# Altium PCB LaserDiode_Driver.PcbDoc (part 1 of 3)
Units mm, origin at the board's own origin, x right, y up, seen from the top; angles counter-clockwise.
Board outline 91.45 x 80 mm, 4 copper layers (Top Layer, Layer 1, Layer 2, Bottom Layer), stack 1.586 mm thick; 92 components, 37 nets, 225 pads, 313 vias.
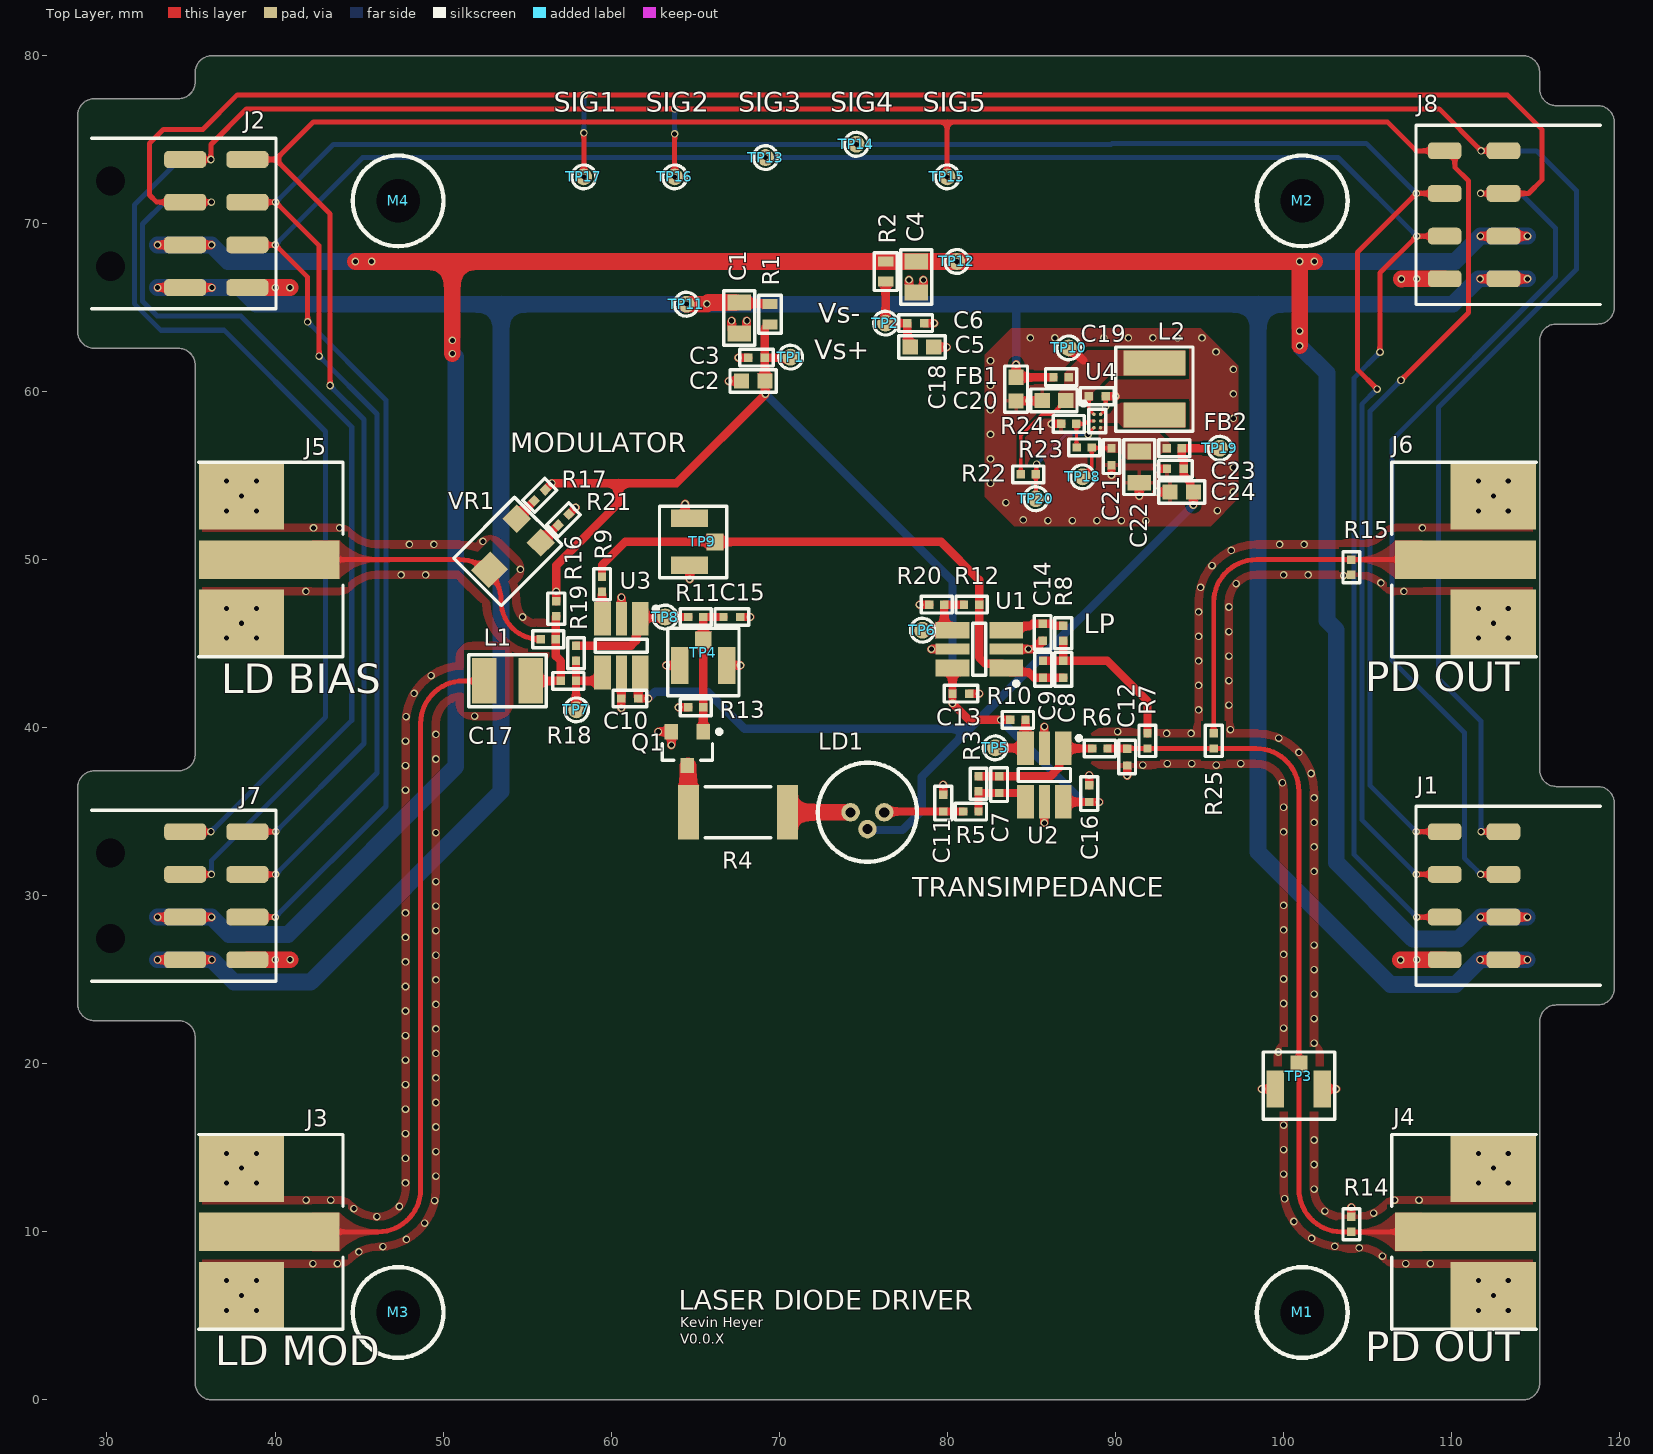
[diagram p0: Top Layer view]
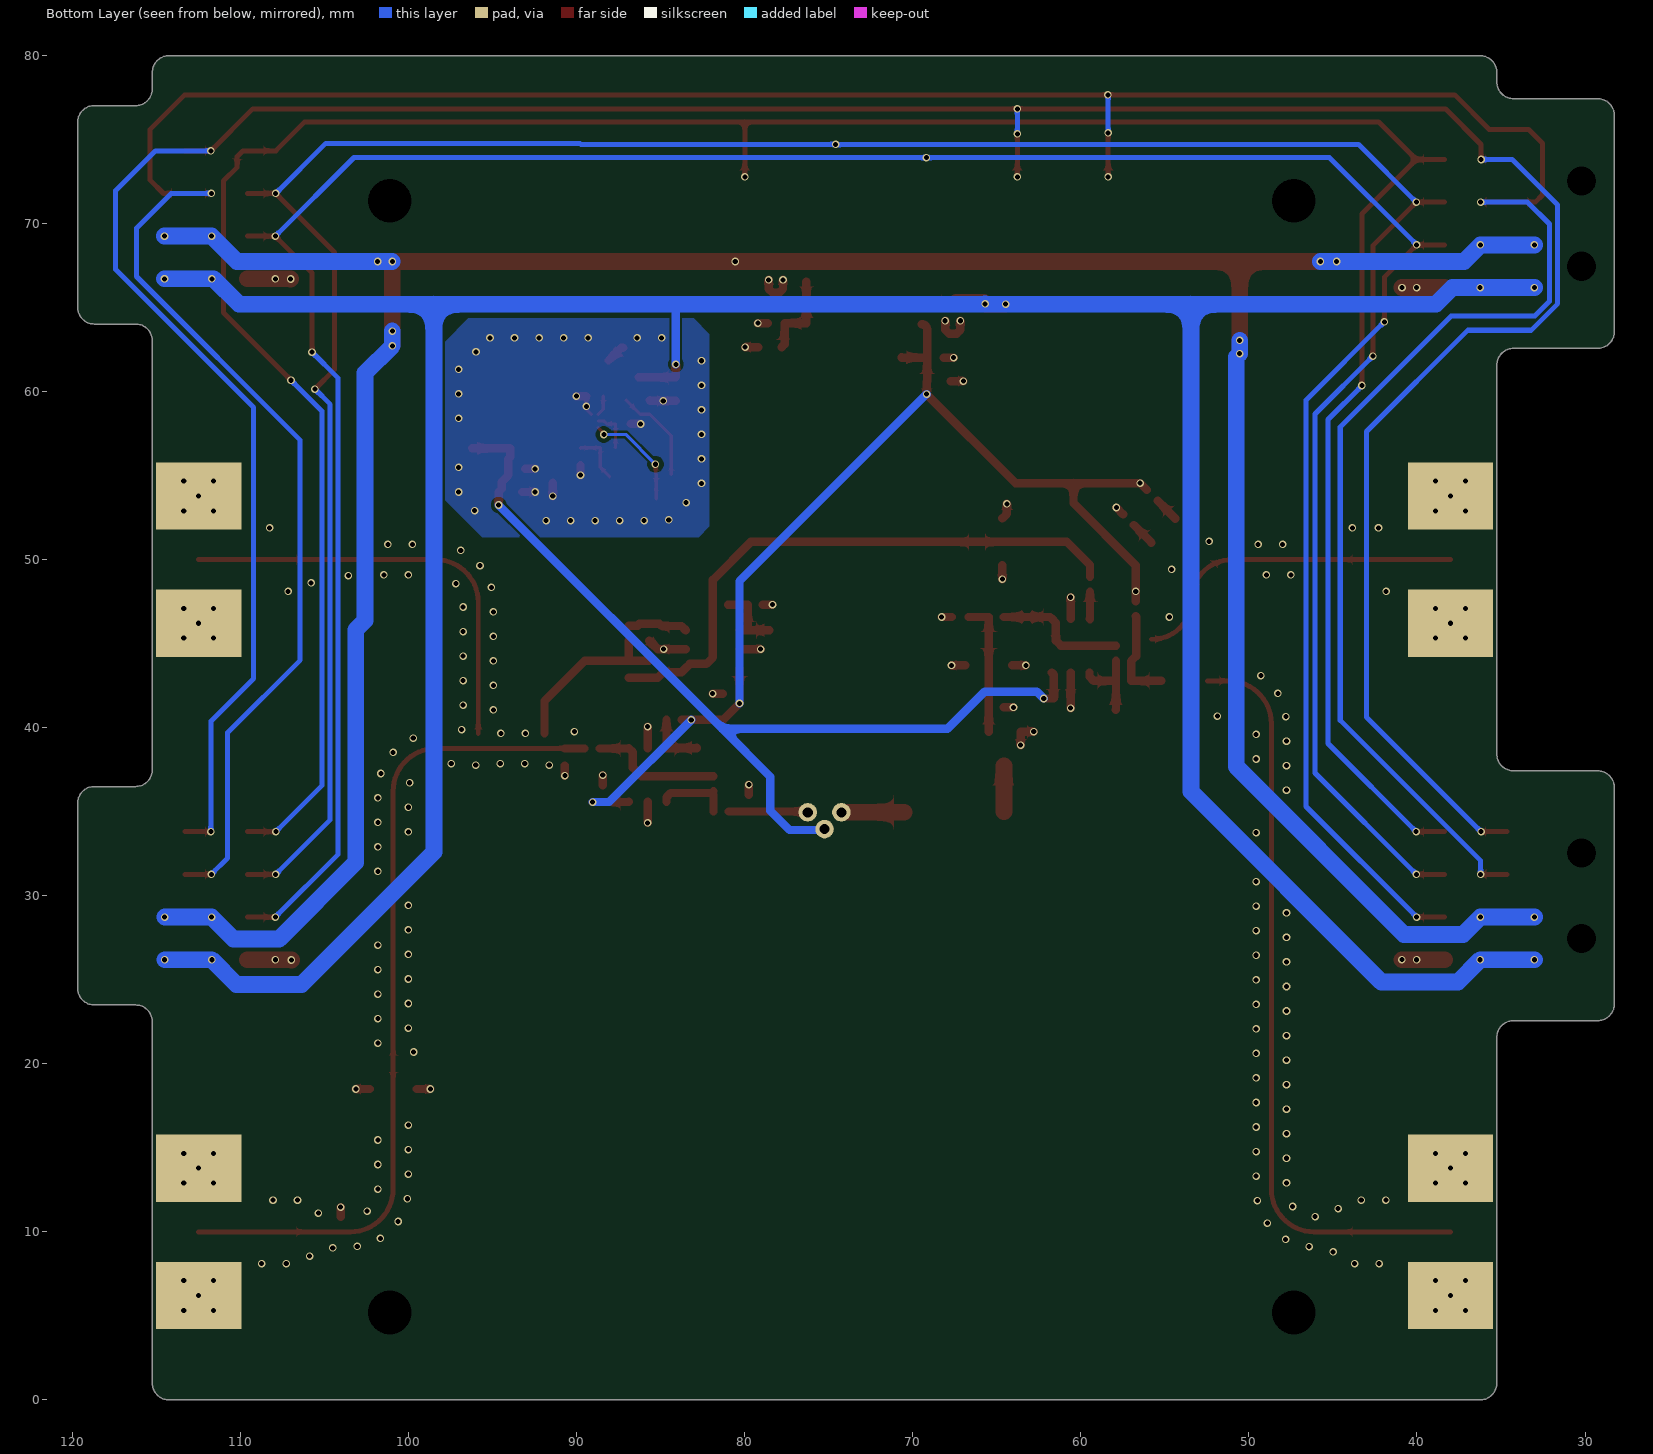
[diagram p1: Bottom Layer view, seen from below]
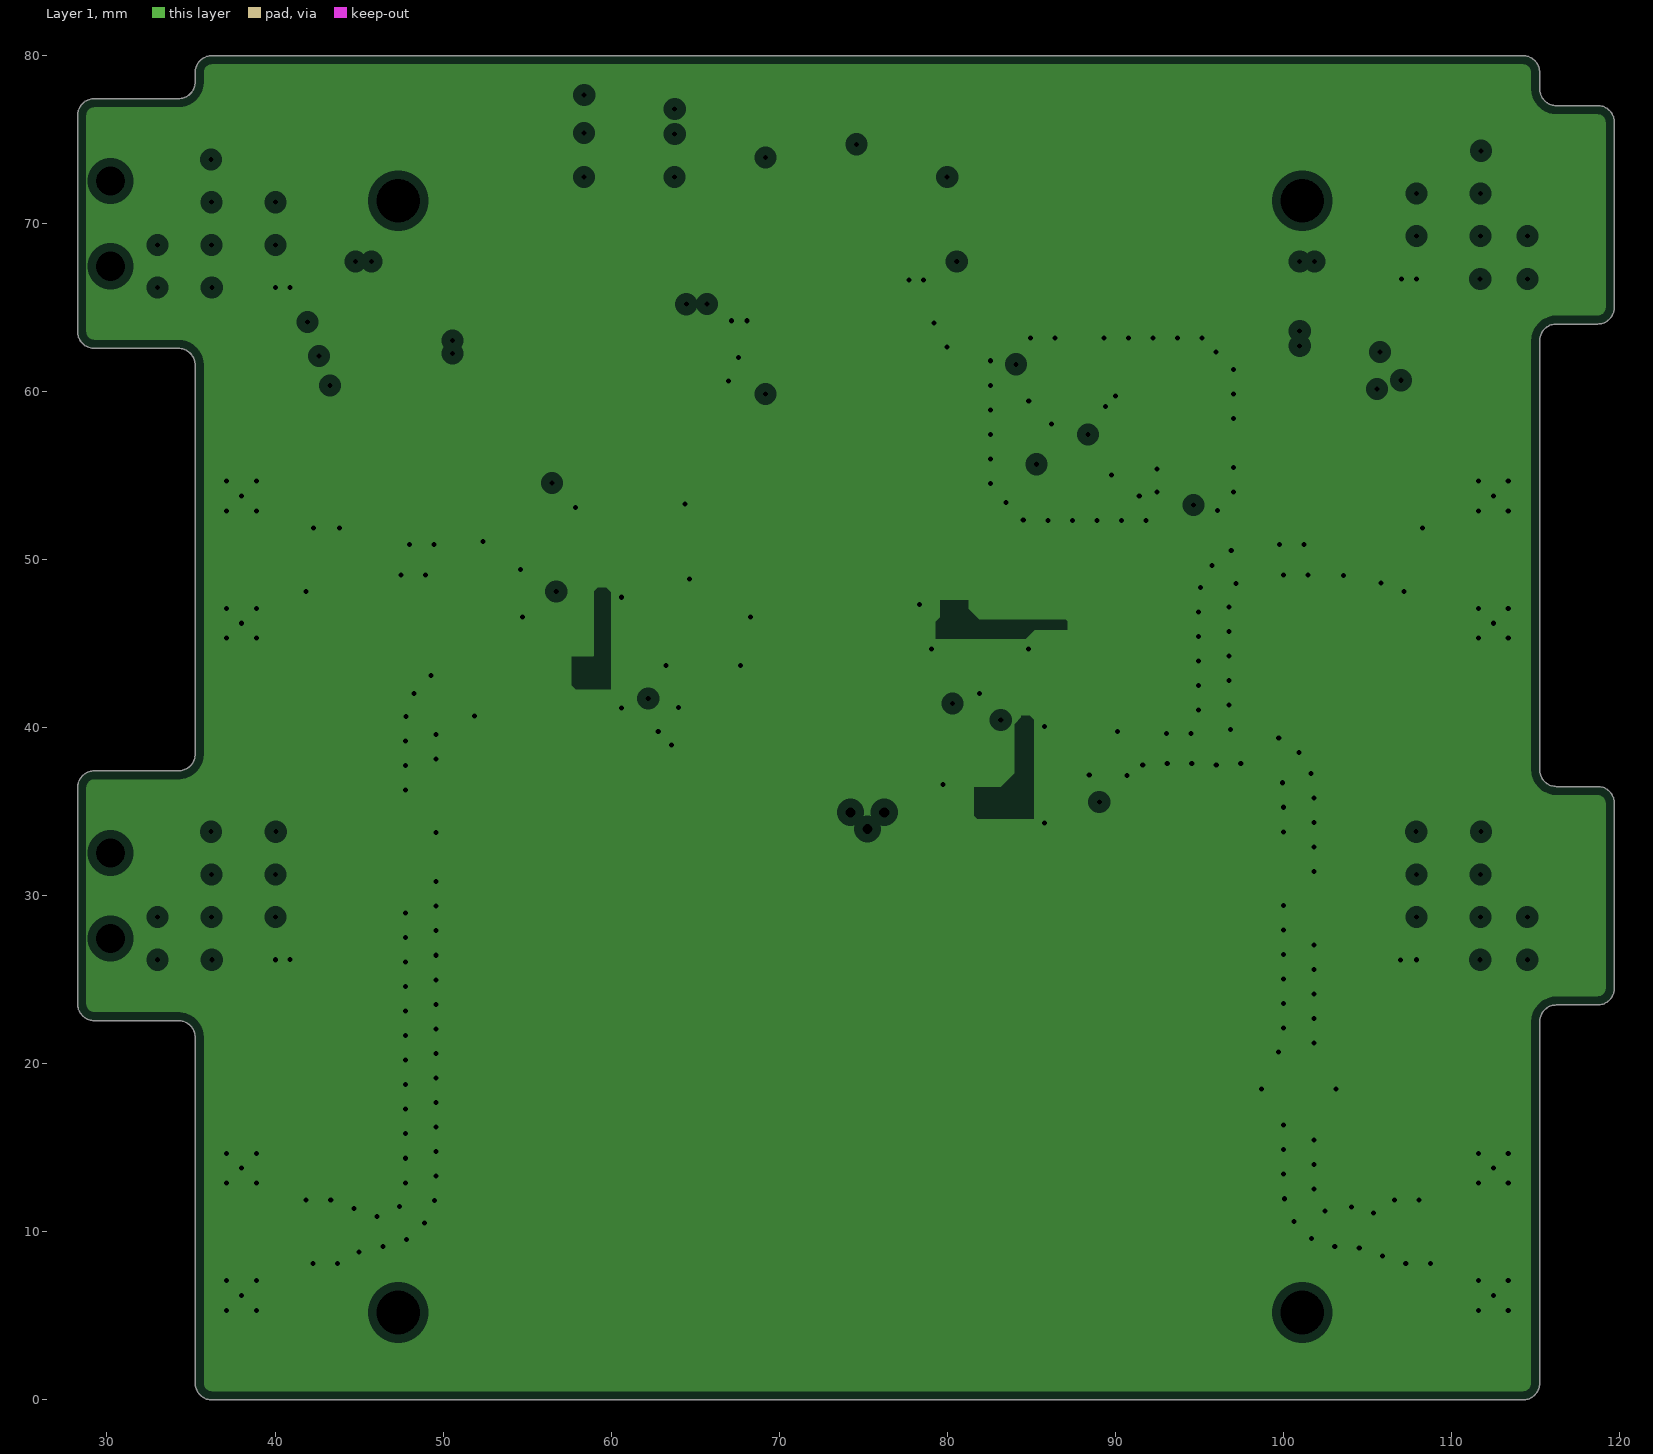
[diagram p2: Layer 1, clearances drawn from the general rule]
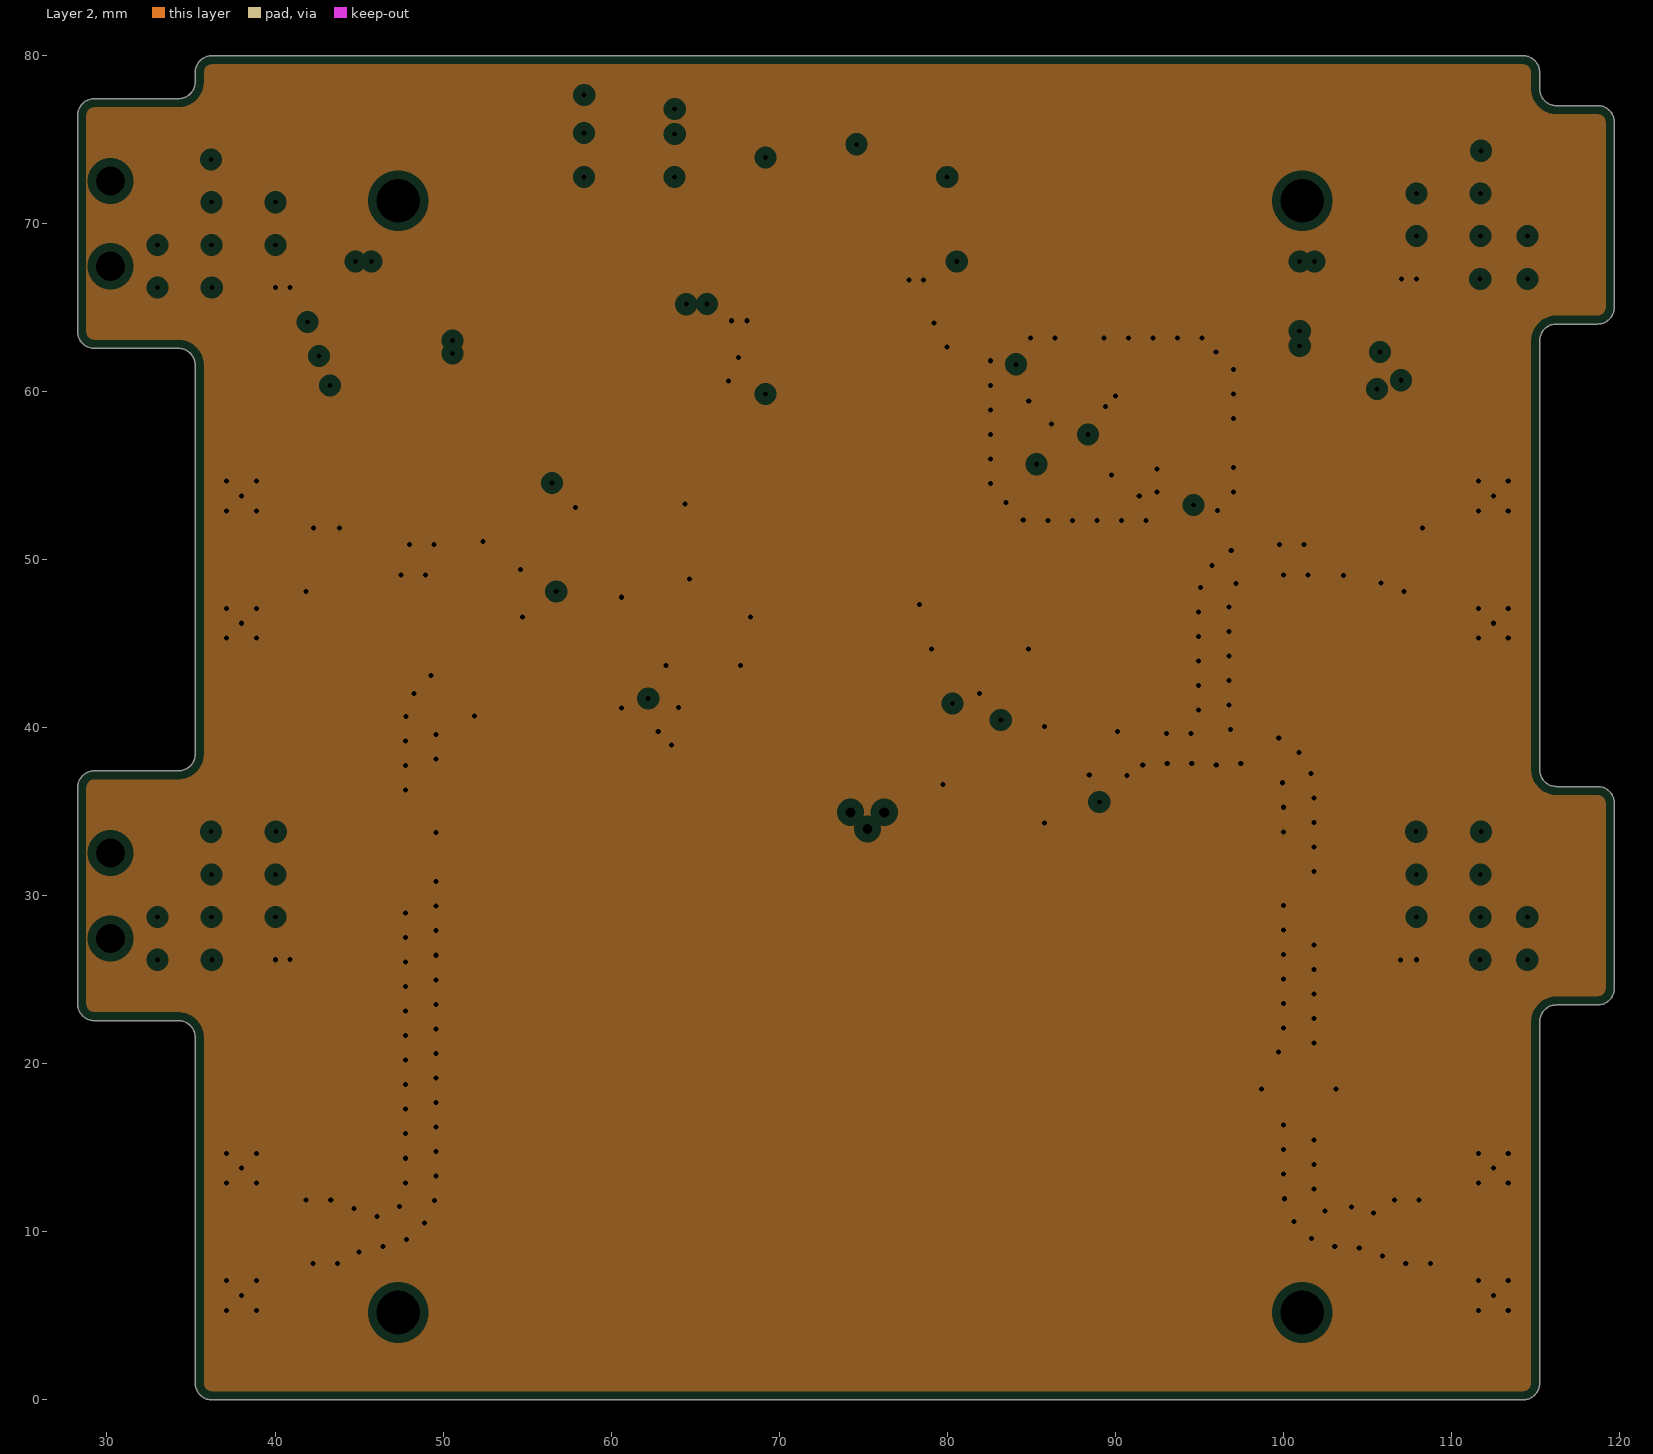
[diagram p3: Layer 2, clearances drawn from the general rule]
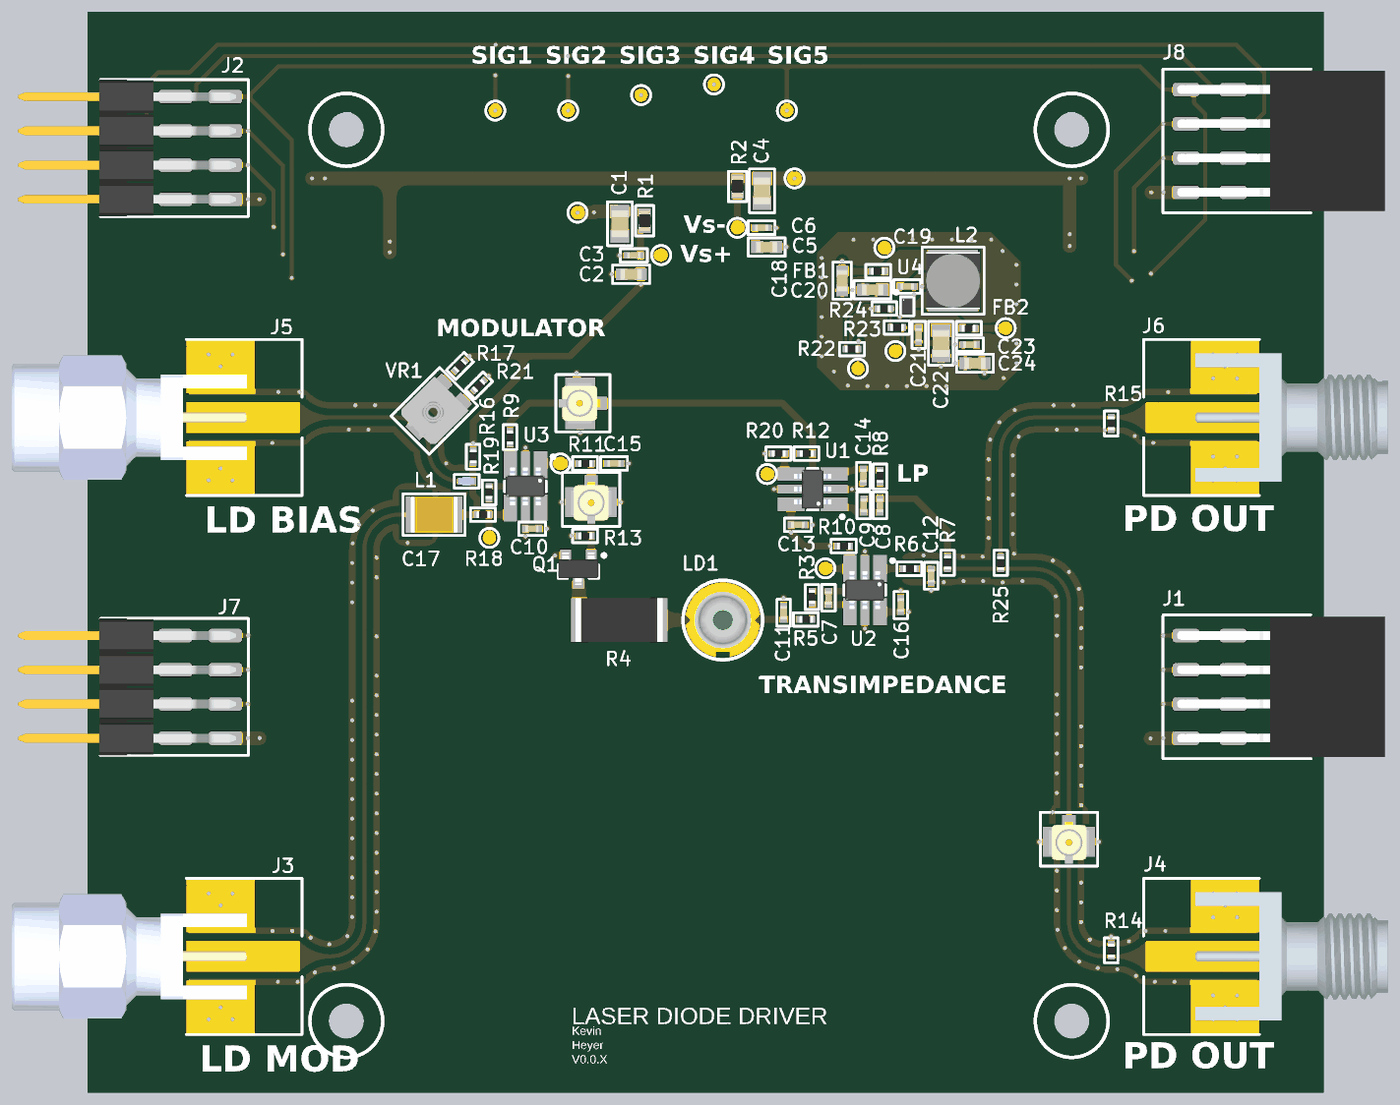
[diagram p5: 3D render of the assembled board from above, using the file's embedded part models]

## Layer stack, top to bottom
Top Solder: solder mask 0.02, SM-001, Dk 3.8
Top Layer: signal copper 0.035
Dielectric 2: prepreg 0.2104, PP-006, Dk 4.6
Layer 1: plane copper 0.0152, net GND
Dielectric 1: dielectric 1.065, FR-4, Dk 4.6
Layer 2: plane copper 0.0152, net GND
Dielectric 3: prepreg 0.2104, PP-006, Dk 4.6
Bottom Layer: signal copper 0.035
Bottom Solder: solder mask 0.02, SM-001, Dk 3.8

## Board outline
29.25,22.57 cw(c29.25,23.57) 28.25,23.57 28.25,36.43 cw(c29.25,36.43) 29.25,37.43 34.25,37.43 ccw(c34.25,38.43) 35.25,38.43 35.25,61.57 ccw(c34.25,61.57) 34.25,62.57 29.25,62.57 cw(c29.25,63.57) 28.25,63.57 28.25,76.43 cw(c29.25,76.43) 29.25,77.43 34.25,77.43 ccw(c34.25,78.43) 35.25,78.43 35.25,78.994 cw(c36.25,78.994) 36.25,79.994 114.25,79.994 cw(c114.25,78.994) 115.25,78.994 115.25,78.02 ccw(c116.25,78.02) 116.25,77.02 118.701,77.02 cw(c118.701,76.02) 119.701,76.02 119.701,65.02 cw(c118.701,65.02) 118.701,64.02 116.25,64.02 ccw(c116.25,63.02) 115.25,63.02 115.25,37.5 ccw(c116.25,37.5) 116.25,36.5 118.701,36.5 cw(c118.701,35.5) 119.701,35.5 119.701,24.5 cw(c118.701,24.5) 118.701,23.5 116.25,23.5 ccw(c116.25,22.5) 115.25,22.5 115.25,0.994 cw(c114.25,0.994) 114.25,-0.006 36.25,-0.006 cw(c36.25,0.994) 35.25,0.994 35.25,21.57 ccw(c34.25,21.57) 34.25,22.57

## Design rules (kind name [scope] priority, off if disabled: settings)
BoardOutlineClearance BoardOutlineClearance_Part [InComponent('J3', 'J4','J5','J6')] p1: gap=0 ignorepadtopadclearanceinfootprint=FALSE
BoardOutlineClearance [OnCopper] p2: gap=0.4 ignorepadtopadclearanceinfootprint=FALSE except(0: Arc-SplitContinuation Track-SplitContinuation SMDPad-SplitContinuation THPad-SplitContinuation Via-SplitContinuation Fill-SplitContinuation Poly-SplitContinuation Region-SplitContinuation Text-SplitContinuation)
Clearance "Schematic Clearance Constraint" [InNetClass('HS_NET')] p1: gap=0.254 ignorepadtopadclearanceinfootprint=TRUE except(0: Arc-Hole Track-Hole SMDPad-Hole THPad-Hole Via-Hole Fill-Hole Poly-Hole Region-Hole Text-Hole; 0.508: Arc-Fill Arc-Poly Arc-Region Track-Fill Track-Poly Track-Region SMDPad-Fill SMDPad-Poly SMDPad-Region THPad-Fill THPad-Poly THPad-Region Via-Fill Via-Poly Via-Region Fill-Fill Fill-Poly Fill-Region Poly-Poly Poly-Region Region-Region)
Clearance Clearance_HS_PLANE [InNetClass('USB') vs IsCopperRegion and not InNet('4V0')] p2: gap=0.254 ignorepadtopadclearanceinfootprint=FALSE except(0: Arc-Hole Track-Hole SMDPad-Hole THPad-Hole Via-Hole Fill-Hole Poly-Hole Region-Hole Text-Hole; 0.09: Arc-Arc Arc-Track Track-Track; 0.102: Arc-SMDPad Track-SMDPad; 0.127: SMDPad-SMDPad; 0.2: SMDPad-Fill SMDPad-Poly SMDPad-Region Fill-Fill Fill-Poly Fill-Region Poly-Poly Poly-Region Region-Region; 0.33: Arc-THPad Track-THPad SMDPad-THPad; 0.5: Arc-Fill Arc-Poly Arc-Region Track-Fill Track-Poly Track-Region THPad-THPad THPad-Via THPad-Fill THPad-Poly THPad-Region THPad-Text Via-Via)
Clearance Clearance_BGA [InNetClass('BGA_FINE_PITCH') vs not IsThruPin] p3: gap=0.254 ignorepadtopadclearanceinfootprint=FALSE except(0: Arc-Hole Track-Hole SMDPad-Hole THPad-Hole Via-Hole Fill-Hole Poly-Hole Region-Hole Text-Hole; 0.09: Arc-Arc Arc-Track Track-Track; 0.102: Arc-SMDPad Track-SMDPad; 0.127: Arc-Fill Arc-Poly Arc-Region Track-Fill Track-Poly Track-Region SMDPad-SMDPad; 0.2: SMDPad-Fill SMDPad-Poly SMDPad-Region Fill-Fill Fill-Poly Fill-Region Poly-Poly Poly-Region Region-Region; 0.33: Arc-THPad Track-THPad SMDPad-THPad; 0.5: THPad-THPad THPad-Via THPad-Fill THPad-Poly THPad-Region THPad-Text Via-Via)
Clearance Clearance_TH [IsThruPin and InAnyNet] p4: gap=0.3 ignorepadtopadclearanceinfootprint=FALSE except(0: Arc-Hole Track-Hole SMDPad-Hole THPad-Hole Via-Hole Fill-Hole Poly-Hole Region-Hole Text-Hole; 0.09: Arc-Arc Arc-Track Track-Track; 0.127: Arc-SMDPad Track-SMDPad SMDPad-SMDPad; 0.254: Arc-Via Arc-Text Track-Via Track-Text SMDPad-Via SMDPad-Text Via-Text Fill-Text Poly-Text Region-Text Text-Text; 0.33: Arc-THPad Track-THPad SMDPad-THPad; 0.5: THPad-Via THPad-Text Via-Via)
Clearance [All] p5: gap=0.254 ignorepadtopadclearanceinfootprint=FALSE except(0: Arc-Hole Track-Hole SMDPad-Hole THPad-Hole Via-Hole Fill-Hole Poly-Hole Region-Hole Text-Hole; 0.127: Arc-SMDPad Arc-Fill Arc-Poly Arc-Region Track-SMDPad Track-Fill Track-Poly Track-Region SMDPad-SMDPad; 0.15: Arc-Arc Arc-Track Track-Track; 0.2: SMDPad-Fill SMDPad-Poly SMDPad-Region Fill-Fill Fill-Poly Fill-Region Poly-Poly Poly-Region Region-Region; 0.3: THPad-THPad; 0.31: THPad-Via; 0.32: THPad-Fill THPad-Poly THPad-Region; 0.33: THPad-Text; 0.5: Via-Via)
DiffPairsRouting [All] p1: maxlimit=0.127 minlimit=0.127 mostfreqgap=0.127 toplayer_minwidth=0.102 toplayer_maxwidth=0.147 toplayer_prefwidth=0.147 bottomlayer_minwidth=0.102 bottomlayer_maxwidth=0.147 bottomlayer_prefwidth=0.147 maxuncoupledlength=12.7
HoleSize [All] p1: absolutevalues=TRUE maxlimit=6.3 minlimit=0.2 maxpercent=80.000 minpercent=20.000
HoleToHoleClearance [All] p1: gap=0.1 allowstackedmicrovias=TRUE
MatchedLengths MatchLengths_xSignals_J2_U5 [InxSignalClass('xSignals_J2_U5_MatchLengthsClass')] p1: tolerance=1.1 checknetsindiffpair=FALSE checkdiffpairvsdiffpair=TRUE checkxsignals=TRUE checkothers=TRUE
MatchedLengths MatchLengths_xSignals_U5_J2 [InxSignalClass('xSignals_U5_J2_MatchLengthsClass')] p2: tolerance=2.54 checknetsindiffpair=FALSE checkdiffpairvsdiffpair=TRUE checkxsignals=TRUE checkothers=TRUE
MaxMinImpedance "Schematic Impedance Constraint" [InNetClass('HS_NET')] p1: minimum=42.50 maximum=57.50
MinimumAnnularRing [All] p1: minimumring=0.05
PlaneClearance [All] p1: clearance=0.508
PlaneConnect [All] p1: planeconnectstyle=Direct reliefexpansion=0.508 reliefentries=4 reliefconductorwidth=0.254 reliefairgap=0.254
PolygonConnect [All] p1: thpad.connectstyle=Relief thpad.reliefconductorwidth=0.5 thpad.reliefentries=4 thpad.polygonreliefangle="90 Angle" thpad.airgapwidth=0.254 smdpad.connectstyle=Relief smdpad.reliefconductorwidth=0.254 smdpad.reliefentries=4 smdpad.polygonreliefangle="90 Angle" smdpad.airgapwidth=0.254 via.connectstyle=Direct via.reliefconductorwidth=0.254 via.reliefentries=4 via.polygonreliefangle="90 Angle" via.airgapwidth=0.254
RoutingVias [All] p1: holewidth=0.2 width=0.5 viastyle="Through Hole" minholewidth=0.2 minwidth=0.45 maxholewidth=0.4 maxwidth=0.8
SilkToSilkClearance [All] p1: silktosilkclearance=0
SilkToSolderMaskClearance [IsPad] p1: minsilkscreentomaskgap=0 clearancetoexposedcopper=TRUE
SolderMaskExpansion SolderMaskExpansion_VIa [isVia] p1: expansion=0.102 istentingtop=TRUE
SolderMaskExpansion [All] p2: expansion=0.05 istentingtop=FALSE
UnRoutedNet [All] p1: checkbadconnections=TRUE
Width [All] p1: maxlimit=50 minlimit=0.102 preferedwidth=0.254
22 further rules are at their usual default settings.

## Classes and differential pairs
net class HS_NET: LD_BIAS MODULATION NetC7_1 NetC7_2 NetJ6_1 PD_ANODE PD_OUTPUT

## Components (designator, comment, footprint, x,y, rotation, side; value= is the part's Value field where it differs from the comment)
C1 "10uF" c0805 67.616,64.375 r90 top
C2 "1uF" c0603 68.45,60.625 r0 top
C3 "100nF" C0402 68.65,62.025 r0 top
C4 "10uF" c0805 78.154,66.817 r90 top
C5 "1uF" c0603 78.5,62.65 r180 top
C6 "100nF" C0402 78.125,64.075 r180 top
C7 "12pF" C0402 83.083,36.611 r270 top
C8 "220nF" C0402 86.9,43.475 r270 top
C9 "220nF" C0402 85.7,43.475 r270 top
C10 "100nF" C0402 61.108,41.736 r180 top
C11 "12pF" C0402 79.758,35.511 r90 top
C12 "100nF" C0402 90.7,38.25 r270 top
C13 "100nF" C0402 80.812,42.025 r0 top
C14 "220nF" C0402 85.675,45.675 r90 top
C15 "100nF" C0402 67.183,46.586 r0 top
C16 "100nF" C0402 88.45,36.075 r90 top
C17 "47uF" C1210 53.833,42.786 r180 top
C18 "1uF" c0603 84.1,60.15 r90 top
C19 "100nF" C0402 88.925,59.725 r180 top
C20 "1uF" c0603 86.35,59.475 r0 top
C21 "100nF" C0402 89.775,56.125 r90 top
C22 "4.7uF" c0805 91.425,55.5 r90 top
C23 "100nF" C0402 93.575,55.4 r0 top
C24 "1uF" c0603 93.95,54.025 r0 top
FB1 "68R" FB0402 86.775,60.85 r0 top
FB2 "68R" FB0402 93.5,56.625 r0 top
J1 "M22-6550442R" "CONN HDR 08 FEMALE RA 2ROW" 111.451,30 r270 top locked
J2 "610108249121" "CONN HDR 08 MALE RA 2ROW - duplicate" 36.5,70 r90 top locked
J3 "HJ-SMA362" "SMA SMD PIN BRD EDGE" 38,10 r90 top locked
J4 "HJ-SMA023" "SMA SMD BORE BRD EDGE" 112.5,10 r270 top locked
J5 "HJ-SMA362" "SMA SMD PIN BRD EDGE" 38,50 r90 top locked
J6 "HJ-SMA023" "SMA SMD BORE BRD EDGE" 112.5,50 r270 top locked
J7 "610108249121" "CONN HDR 08 MALE RA 2ROW - duplicate" 36.5,30 r90 top locked
J8 "M22-6550442R" "CONN HDR 08 FEMALE RA 2ROW" 111.451,70.52 r270 top locked
L1 "390nH" L0402 56.233,45.261 r0 top
L2 "10uH" INDP4040X27N 92.325,60.15 r90 top
LD1 "70mA 6V5" "LD TO-56" 75.25,34.965 r90 top locked
M1 "M2.0" "MECH M2.0 UNPLATED" 101.125,5.2 r0 top
M2 "M2.0" "MECH M2.0 UNPLATED" 101.125,71.35 r0 top
M3 "M2.0" "MECH M2.0 UNPLATED" 47.325,5.2 r0 top
M4 "M2.0" "MECH M2.0 UNPLATED" 47.325,71.35 r0 top
Q1 "2N7002K-T1-E3" "SOT 23-3" 64.533,38.761 r270 top
R1 "GENERIC" R0603 69.456,64.6 r90 top
R2 "GENERIC" R0603 76.341,67.142 r90 top
R3 "33k0" R0402 81.859,36.686 r270 top
R4 "120R" R2512 67.558,34.965 r0 top
R5 "0R" R0402 81.433,35.011 r180 top
R6 "0R" R0402 89.109,38.761 r180 top
R7 "22.1k" R0402 91.915,39.236 r270 top
R8 "22.1k" R0402 86.9,45.65 r270 top
R9 "10k0" R0402 59.458,48.511 r90 top
R10 "1k00" R0402 84.233,40.461 r180 top
R11 "100R" R0402 65.059,46.586 r180 top
R12 "0R" R0402 81.475,47.325 r180 top
R13 "100k" R0402 65.059,41.211 r180 top
R14 "GENERIC" R0402 104.05,10.425 r90 top
R15 "GENERIC" R0402 104.05,49.575 r270 top
R16 "100k" r0402 56.733,47.111 r270 top
R17 "0R" R0402 55.77,53.844 r225 top
R18 "10k0" r0402 57.484,42.786 r180 top
R19 "10k0" r0402 57.908,44.461 r270 top
R20 "1k00" R0402 79.4,47.325 r180 top
R21 "0R" R0402 57.148,52.359 r45 top
R22 "0R" R0402 84.8,55.075 r0 top
R23 "100k" r0402 88.175,56.675 r180 top
R24 "5k60" R0402 87.2,58.075 r0 top
R25 "0R" R0402 95.858,39.186 r90 top
TP1 "1mm" TESTPOINT_SMT 70.675,62.05 r0 top
TP2 "1mm" TESTPOINT_SMT 76.325,64.075 r90 top
TP3 "U.FL" U.FL 100.925,18.5 r180 top
TP4 "U.FL" U.FL 65.483,43.711 r180 top
TP5 "1mm" TESTPOINT_SMT 82.85,38.8 r90 top
TP6 "1mm" TESTPOINT_SMT 78.525,45.8 r0 top
TP7 "1mm" TESTPOINT_SMT 57.933,41.061 r270 top
TP8 "1mm" TESTPOINT_SMT 63.209,46.586 r90 top
TP9 "U.FL" U.FL 64.675,51.056 r90 top
TP10 "1mm" TESTPOINT_SMT 87.225,62.6 r90 top
TP11 "1mm" TESTPOINT_SMT 64.471,65.2 r90 top
TP12 "1mm" TESTPOINT_SMT 80.565,67.742 r90 top
TP13 "1mm" TESTPOINT_SMT 69.187,73.925 r90 top
TP14 "1mm" TESTPOINT_SMT 74.594,74.715 r90 top
TP15 "1mm" TESTPOINT_SMT 80,72.775 r90 top
TP16 "1mm" TESTPOINT_SMT 63.781,72.775 r90 top
TP17 "1mm" TESTPOINT_SMT 58.375,72.775 r90 top
TP18 "1mm" TESTPOINT_SMT 88.05,54.925 r90 top
TP19 "1mm" TESTPOINT_SMT 96.225,56.625 r90 top
TP20 "1mm" TESTPOINT_SMT 85.275,53.625 r90 top
U1 "SOT5/6-23 GENERIC" SOT23-5/6_Modified 81.912,44.675 r180 top
U2 "SOT5/6-23 GENERIC" SOT23-5/6_Modified 85.783,37.186 r270 top
U3 "SOT5/6-23 GENERIC" SOT23-5/6_Modified 60.608,44.886 r270 top
U4 "TPS61046YFFR" "BGA 2x3 0.8x1.2mm TI-YFF0006" 88.925,58.25 r0 top
VR1 "20k" "RV TC33X-2" 53.825,50.45 r135 top

## Footprints (in the part's own frame and the unit in brackets; to place one, negate y for a bottom-side part, rotate by r counter-clockwise, add the part's x,y. Pads: shape width x height; smd on the part's side, far side on the other; paste and mask are expansions set on the pad)
"BGA 2x3 0.8x1.2mm TI-YFF0006" [mm] "BGA, 6-Leads, Body 0.79x1.19mmx0.63mm, Pitch 0.40mm"
  round 0.2 smd: A1(-0.2,0.4) A2(0.2,0.4) B1(-0.2,0) B2(0.2,0) C1(-0.2,-0.4) C2(0.2,-0.4)
  silkscreen extent -0.94,-0.7 0.5,1.17, body extent -0.4,-0.6 0.4,0.6, height 0.63
C0402 [mm]
  rect 0.5x0.5 smd: 1(-0.5,0) 2(0.5,0)
  silkscreen extent -1,-0.5 1,0.5, body extent -0.5,-0.25 0.5,0.25, height 0.51
c0603 [mm]
  rect 0.9x0.9 smd: 1(-0.7,0) 2(0.7,0)
  silkscreen extent -1.38,-0.67 1.38,0.67, body extent -0.8,-0.4 0.8,0.4, height 0.81
c0805 [mm]
  rect 0.95x1.4 smd: 1(-0.925,0) 2(0.925,0)
  silkscreen extent -1.63,-0.92 1.63,0.92, body extent -1,-0.62 1,0.63, height 0.61
C1210 [mm] "Chip Capacitor, 2-Leads, Body 3.20x2.50mm, IPC Medium Density"
  rect 1.45x2.7 smd: 1(-1.375,0) 2(1.375,0)
  silkscreen extent -2.3,-1.55 2.3,1.55, body extent -1.75,-1.35 1.75,1.35, height 2.7
"CONN HDR 08 FEMALE RA 2ROW" [mm]
  rrect50% 1x2 smd: 1(3.81,1.649) 2(1.27,1.649) 3(-1.27,1.649) 4(-3.81,1.649) 5(3.81,-1.849) 6(1.27,-1.849) 7(-1.27,-1.849) 8(-3.81,-1.849)
  silkscreen extent -5.33,-3.56 5.33,7.41, body extent -5.21,-2.51 5.21,12.89, height 5.01
"CONN HDR 08 MALE RA 2ROW - duplicate" [mm]
  round 0 hole 1.73 unplated: 0(-2.54,6.299) 0(2.54,6.299)
  rrect50% 1x2.5 smd: 1(-3.81,1.849) 2(-1.27,1.849) 3(1.27,1.849) 4(3.81,1.849) 5(-3.81,-1.849) 6(-1.27,-1.849) 7(1.27,-1.849) 8(3.81,-1.849)
  silkscreen extent -5.08,-3.56 5.08,7.41, body extent -5.08,-2.67 5.08,13.49, height 5.09
FB0402 [mm]
  rect 0.5x0.5 smd: 1(-0.45,0) 2(0.45,0)
  silkscreen extent -0.92,-0.5 0.92,0.5, body extent -0.53,-0.25 0.47,0.25, height 0.36
INDP4040X27N [mm] "Precision Wire Wound Inductor, 2-Leads, Body 4.00x4.00mm, IPC Medium Density"
  rect 1.5x3.7 smd: 1(-1.55,0) 2(1.55,0)
  silkscreen extent -2.5,-2.3 2.5,2.3, body extent -2.1,-2 2.1,2, height 2.8
L0402 [mm]
  rect 0.5x0.5 smd: 1(-0.425,0) 2(0.475,0)
  silkscreen extent -0.9,-0.5 0.95,0.5, body extent -0.55,-0.32 0.56,0.34, height 0.66
"LD TO-56" [mm]
  round 1.1 hole 0.6: 1(0,1) 2(-1,0) 3(0,-1)
  silkscreen extent -2.95,-2.95 2.95,2.95, body extent -2.73,-2.77 2.8,2.77, height 3.5
"MECH M2.0 UNPLATED" [mm]
  round 0 hole 2.6 unplated: 1(0,0)
  silkscreen extent -2.7,-2.7 2.7,2.7
R0402 [mm]
  rect 0.5x0.5 smd: 1(-0.425,0) 2(0.475,0)
  silkscreen extent -0.9,-0.5 0.95,0.5, body extent -0.5,-0.25 0.5,0.25, height 0.36
r0402 [mm]
  rect 0.5x0.5 smd: 1(-0.425,0) 2(0.475,0)
  silkscreen extent -0.9,-0.5 0.95,0.5, body extent -0.5,-0.25 0.5,0.25, height 0.36
R0603 [mm]
  rect 0.6x0.9 smd: 1(-0.6,0) 2(0.6,0)
  silkscreen extent -1.12,-0.67 1.12,0.67, body extent -0.77,-0.43 0.78,0.43, height 0.46
R2512 [mm] "Chip Resistor, 2-Leads, Body 6.35x3.10mm, IPC Medium Density"
  rect 1.25x3.25 smd: 1(-2.95,0) 2(2.95,0)
  silkscreen extent -1.95,-1.52 1.95,1.53, body extent -3.22,-1.63 3.22,1.63, height 0.65
"RV TC33X-2" [mm]
  rect 1.2x1.2 smd: 1(-1,-1.8) 3(1,-1.8)
  rect 1.5x1.6 smd: 2(0,1.5)
  silkscreen extent -2,-2.6 2,2.5, body extent -1.8,-1.91 1.8,2.05, height 1.13
"SMA SMD BORE BRD EDGE" [mm]
  rect 4x5.08 smd paste-25.375: 0(-3.786,0) 0(3.786,0)
  rect 4x5.08 smd far side paste-25.375: 0(-3.786,0) 0(3.786,0)
  rect 2.286x8.382 smd paste-25.375: 1(0,-1.651)
  silkscreen extent -5.79,-6.04 5.79,2.54, body extent -4.76,-2.21 4.76,12.07, height 4.36
"SMA SMD PIN BRD EDGE" [mm]
  rect 4x5.08 smd paste-25.375: 0(-3.786,0) 0(3.786,0)
  rect 4x5.08 smd far side paste-25.375: 0(-3.786,0) 0(3.786,0)
  rect 2.286x8.382 smd paste-25.375: 1(0,-1.651)
  silkscreen extent -5.79,-6.04 5.79,2.54, body extent -4.62,-1.96 4.62,15.49, height 4.38
SOT23-5/6_Modified [mm] "SOT23, 6-Leads, Body 2.90x2.80mm, Pitch 0.95mm, IPC Low Density"
  rect 2x1 smd: 1(-1.6,1.125) 3(-1.6,-1.125) 4(1.6,-1.125) 6(1.6,1.125)
  rect 2x0.65 smd: 2(-1.6,0) 5(1.6,0)
  silkscreen extent -2.32,-1.55 0.39,2.17, body extent -1.4,-1.45 1.4,1.45, height 1.45
"SOT 23-3" [mm]
  rect 0.9x0.8 smd: 1(-1,0.95) 2(-1,-0.95) 3(1,0)
  silkscreen extent -1.12,-1.5 0.7,2.03, body extent -1.2,-1.5 1.2,1.5, height 1.15
TESTPOINT_SMT [mm] "testpoint smt"
  round 1 smd paste-1111: 1(0,0)
  silkscreen extent -0.71,-0.71 0.71,0.71
U.FL [mm] "SOT23, 6-Leads, Body 2.90x2.80mm, Pitch 0.95mm, IPC Low Density"
  rect 1.05x2.2 smd: 0(-1.4,0) 0(1.4,0)
  rect 1x1 smd: 1(0,-1.5)
  silkscreen extent -2.12,-2.2 2.12,1.8, body extent -1.5,-1.5 1.5,1.6, height 1.26

## Part data
C1 C4: library part "CAP CER 10uF 25V X5R 0805", "Cap Ceramic 10uF 25V X5R 10% SMD 0805 85°C Embossed T/R", Case Code (Imperial)=0805, Case Code (Metric)=2012, Dielectric=X5R, Manufacturer=Samsung, Manufacturer Part Number=CL21A106KAYNNNE, Max Operating Temperature=85°C, Min Operating Temperature=-55°C, Package Quantity=1, Supplier Part Number 1=1276-2891-2-ND, Tolerance=10%, Voltage Rating=25V, Capacitance=10uF, Case/Package=0805, Category="Ceramic Capacitors", ComponentLink1Description=https://datasheet.ciiva.com/25796/cl21a106kaynnne-25796720.pdf?src-supplier=Digi-Key, ComponentLink1URL=https://datasheet.ciiva.com/25796/cl21a106kaynnne-25796720.pdf?src-supplier=Digi-Key, ComponentLink2Description=https://datasheet.ciiva.com/26838/getdatasheetpartid-357558-26838583.pdf?src-supplier=Verical, ComponentLink2URL=https://datasheet.ciiva.com/26838/getdatasheetpartid-357558-26838583.pdf?src-supplier=Verical, Construction=Flat, Depth=1.25mm, Height=1.25mm, Length=2mm, Mount="Surface Mount", Packaging="Tape and Reel", Pricing 1="2000=0.03549, 4000=0.03247 (USD)", Radiation Hardening=No, RoHS=Yes, RoHS Compliant=Yes, Series=CL, Stock 1=2266338, Supplier 1=Digi-Key, Thickness=0.057inch, Width=0.049inch
C2 C5 C18 C20 C24: library part "CAP CER 1uF 50V X5R 0603", "Multilayer Ceramic Capacitors (High dielectric type), 50V, 1 uF, ± 10 %, 0603, X5R, RoHS", Case Code (Imperial)=0603, Case Code (Metric)=1608, Dielectric=X5R, Manufacturer="Taiyo Yuden", Manufacturer Part Number=UMK107BJ105KA-T, Max Operating Temperature=85°C, Min Operating Temperature=-55°C, Package Quantity=1, Supplier Part Number 1=587-2400-1-ND, Tolerance=10%, Voltage Rating=50V, Capacitance=1uF, Case/Package=0603, Category="Ceramic Capacitors", ComponentLink1Description=https://datasheet.ciiva.com/134/umk107bj105ka-t-ss-134740.pdf?src-supplier=Digi-Key, ComponentLink1URL=https://datasheet.ciiva.com/134/umk107bj105ka-t-ss-134740.pdf?src-supplier=Digi-Key, ComponentLink2Description=https://datasheet.ciiva.com/11601/umk107bj105ka-t-ss-11601811.pdf?src-supplier=Avnet, ComponentLink2URL=https://datasheet.ciiva.com/11601/umk107bj105ka-t-ss-11601811.pdf?src-supplier=Avnet, ComponentLink3Description=https://datasheet.ciiva.com/5744/1697715-5744913.pdf?src-supplier=Farnell, ComponentLink3URL=https://datasheet.ciiva.com/5744/1697715-5744913.pdf?src-supplier=Farnell, ComponentLink4Description=https://datasheet.ciiva.com/30199/43umk107bj105ka-t-30199791.pdf?src-supplier=Onlinecomponents.com, ComponentLink4URL=https://datasheet.ciiva.com/30199/43umk107bj105ka-t-30199791.pdf?src-supplier=Onlinecomponents.com, ComponentLink5Description=https://datasheet.ciiva.com/15922/336umk107bj105ka-t-15922611.pdf?src-supplier=Onlinecomponents.com, ComponentLink5URL=https://datasheet.ciiva.com/15922/336umk107bj105ka-t-15922611.pdf?src-supplier=Onlinecomponents.com, ComponentLink6Description=https://datasheet.ciiva.com/5427/mlcc-all-e-541559-5427036.pdf?src-supplier=Mouser, ComponentLink6URL=https://datasheet.ciiva.com/5427/mlcc-all-e-541559-5427036.pdf?src-supplier=Mouser, ComponentLink7Description=https://datasheet.ciiva.com/7975/mlcc-all-e-7975898.pdf?src-supplier=Element14, ComponentLink7URL=https://datasheet.ciiva.com/7975/mlcc-all-e-7975898.pdf?src-supplier=Element14, ComponentLink8Description=https://datasheet.ciiva.com/7975/1697715-7975608.pdf?src-supplier=Element14, ComponentLink8URL=https://datasheet.ciiva.com/7975/1697715-7975608.pdf?src-supplier=Element14, ComponentLink9Description=https://datasheet.ciiva.com/22694/1697715-22694278.pdf?src-supplier=Element14, ComponentLink9URL=https://datasheet.ciiva.com/22694/1697715-22694278.pdf?src-supplier=Element14, Construction=Flat, Contact Plating=Nickel, Depth=0.8mm, Halogen Free="Halogen Free", Height=0.8mm, Length=1.6mm, Mount="Surface Mount", Number of Pins=2, Packaging="Tape and Reel", Pricing 1="1=0.19000, 10=0.12900, 50=0.07760, 100=0.06560, 500=0.04484, 1000=0.03968 (USD)", Radiation Hardening=No, REACH SVHC=Unknown, RoHS=Yes, RoHS Compliant=Yes, Series=M, Stock 1=955108, Supplier 1=Digi-Key, Termination=SMD/SMT, Thickness=0.035inch, Voltage Rating (DC)=50V, Width=0.031inch
C3 C6 C10 C12 C13 C15 C16 C19 C21 C23: library part "CAP CER 100nF 25V X5R 0402", "Cap Ceramic 0.1uF 25V X5R 10% Pad SMD 0402 85¡ãC T/R / Multi Layer Ceramic Capacitor (MLCC)", Case Code (Imperial)=0402, Case Code (Metric)=1005, Dielectric=X5R, Manufacturer=Samsung, Manufacturer Part Number=CL05A104KA5NNNC, Max Operating Temperature=85°C, Min Operating Temperature=-55°C, Package Quantity=1, Supplier Part Number 1=1276-1043-1-ND, Tolerance=10%, Voltage=25V, Capacitance=100nF, Case/Package=0402, Category="Ceramic Capacitors", ComponentLink1Description=https://datasheet.ciiva.com/25802/cl05a104ka5nnnc-25802704.pdf?src-supplier=Digi-Key, ComponentLink1URL=https://datasheet.ciiva.com/25802/cl05a104ka5nnnc-25802704.pdf?src-supplier=Digi-Key, ComponentLink2Description=https://datasheet.ciiva.com/26838/getdatasheetpartid-357412-26838142.pdf?src-supplier=Verical, ComponentLink2URL=https://datasheet.ciiva.com/26838/getdatasheetpartid-357412-26838142.pdf?src-supplier=Verical, ComponentLink3Description=https://datasheet.ciiva.com/16437/cl05a104ka5nnnc-16437369.pdf?src-supplier=Future+Electronics, ComponentLink3URL=https://datasheet.ciiva.com/16437/cl05a104ka5nnnc-16437369.pdf?src-supplier=Future+Electronics, ComponentLink4Description=https://datasheet.ciiva.com/26309/mlcc-catalogdownload2013-eng-26309014.pdf?src-supplier=Distrelec, ComponentLink4URL=https://datasheet.ciiva.com/26309/mlcc-catalogdownload2013-eng-26309014.pdf?src-supplier=Distrelec, Construction=Flat, Depth=0.5mm, Height=0.5mm, Lead Free="Lead Free", Length=1mm, Mount="Surface Mount", Packaging="Tape and Reel", Pricing 1="1=0.10000, 10=0.01100, 50=0.00600, 100=0.00490, 500=0.00346, 1000=0.00272, 2500=0.00248, 5000=0.00228 (USD)", Radiation Hardening=No, RoHS=Yes, Series=CL, Stock 1=8053194, Supplier 1=Digi-Key, Thickness=0.022inch, Voltage Rating=25V, Voltage Rating (DC)=25V, Width=0.02inch
C7 C11: library part "CAP CER 12pF 50V C0G 0402", "Ceramic capacitor SMD-0402 12pF /50V C0G# J +-5%, Samsung, RoHS", Case Code (Imperial)=0402, Case Code (Metric)=1005, Dielectric=C0G, Manufacturer=Samsung, Manufacturer Part Number=CL05C120JB5NNNC, Max Operating Temperature=125°C, Min Operating Temperature=-55°C, Package Quantity=1, Supplier Part Number 1=1276-1178-2-ND, Temperature Coefficient=300ppm/°C, Tolerance=5%, Voltage=50V, Capacitance=12pF, Case/Package=0402, Category="Ceramic Capacitors", ComponentLink1Description=https://datasheet.ciiva.com/25806/cl05c120jb5nnnc-25806484.pdf?src-supplier=Digi-Key, ComponentLink1URL=https://datasheet.ciiva.com/25806/cl05c120jb5nnnc-25806484.pdf?src-supplier=Digi-Key, ComponentLink2Description=https://datasheet.ciiva.com/26838/getdatasheetpartid-658047-26838280.pdf?src-supplier=Verical, ComponentLink2URL=https://datasheet.ciiva.com/26838/getdatasheetpartid-658047-26838280.pdf?src-supplier=Verical, ComponentLink3Description=https://datasheet.ciiva.com/29198/458703-da-01-en-vs-kondensator-0402-29198421.pdf?src-supplier=Conrad, ComponentLink3URL=https://datasheet.ciiva.com/29198/458703-da-01-en-vs-kondensator-0402-29198421.pdf?src-supplier=Conrad, ComponentLink4Description=https://datasheet.ciiva.com/16449/cl05b104kq5nnnc-16449055.pdf?src-supplier=Future+Electronics, ComponentLink4URL=https://datasheet.ciiva.com/16449/cl05b104kq5nnnc-16449055.pdf?src-supplier=Future+Electronics, Construction=Flat, Contact Plating=Tin, Depth=0.5mm, Height=0.5mm, Lead Free="Lead Free", Length=1mm, Material=Ceramic, Mount="Surface Mount", Packaging="Tape and Reel", Pricing 1="10000=0.00386, 20000=0.00367 (USD)", Radiation Hardening=No, RoHS=Yes, RoHS Compliant=Yes, Series=CL, Stock 1=41998, Supplier 1=Digi-Key, Thickness=0.022inch, Voltage Rating=50V, Voltage Rating (DC)=50V, Width=0.02inch
C8 C9 C14: library part "CAP CER 220nF 16V X7R 0402", "CAP CER 0.22UF 16V X7R 0402", Case Code (Imperial)=0402, Case Code (Metric)=1005, Dielectric=X7R, Manufacturer=Samsung, Manufacturer Part Number=CL05B224KO5NNNC, Max Operating Temperature=125°C, Min Operating Temperature=-55°C, Package Quantity=1, Supplier Part Number 1=82AC9227, Tolerance=10%, Voltage Rating=16V, Capacitance=220nF, Case/Package=0402, Category="Ceramic Capacitors", ComponentLink1Description=https://datasheet.ciiva.com/25800/cl05b224ko5nnnc-25800450.pdf?src-supplier=Digi-Key, ComponentLink1URL=https://datasheet.ciiva.com/25800/cl05b224ko5nnnc-25800450.pdf?src-supplier=Digi-Key, ComponentLink2Description=https://datasheet.ciiva.com/16428/cl05b224ko5nnnc-16428810.pdf?src-supplier=Future+Electronics, ComponentLink2URL=https://datasheet.ciiva.com/16428/cl05b224ko5nnnc-16428810.pdf?src-supplier=Future+Electronics, ComponentLink3Description=https://datasheet.ciiva.com/26838/getdatasheetpartid-358459-26838228.pdf?src-supplier=Verical, ComponentLink3URL=https://datasheet.ciiva.com/26838/getdatasheetpartid-358459-26838228.pdf?src-supplier=Verical, Construction=Flat, Depth=0.5mm, Height=0.5mm, Length=1mm, Mount="Surface Mount", Packaging="Tape and Reel", Pricing 1="1=0.10000, 25=0.03000, 100=0.01300, 250=0.01100, 500=0.00900, 1000=0.00700 (USD)", Radiation Hardening=No, RoHS=Yes, RoHS Compliant=Yes, Series=CL, Stock 1=3820, Supplier 1=Newark, Thickness=0.022inch, Width=0.02inch
C17: library part "CAP CER 47uF 10V X7R 1210", "CAP CER 47UF 10V 20% X7R 1210", Case Code (Imperial)=1210, Case Code (Metric)=3225, Dielectric=X7R, Manufacturer=Murata, Manufacturer Part Number=GRM32ER71A476ME15L, Max Operating Temperature=125°C, Min Operating Temperature=-55°C, Package Quantity=1, Supplier Part Number 1=40X5909, Tolerance=20%, Voltage=10V, Capacitance=47uF, Case/Package=1210, Category="Ceramic Capacitors", ComponentLink1Description=https://datasheet.ciiva.com/46441/1754712-46441338.pdf?src-supplier=Element14, ComponentLink1URL=https://datasheet.ciiva.com/46441/1754712-46441338.pdf?src-supplier=Element14, ComponentLink2Description=https://datasheet.ciiva.com/6264/partnumbering-e-01-6264587.pdf?src-supplier=Digi-Key, ComponentLink2URL=https://datasheet.ciiva.com/6264/partnumbering-e-01-6264587.pdf?src-supplier=Digi-Key, ComponentLink3Description=https://datasheet.ciiva.com/6264/partnumbering-e-01-6264586.pdf?src-supplier=Digi-Key, ComponentLink3URL=https://datasheet.ciiva.com/6264/partnumbering-e-01-6264586.pdf?src-supplier=Digi-Key, ComponentLink4Description=https://datasheet.ciiva.com/6264/partnumbering-e-01-6264588.pdf?src-supplier=Digi-Key, ComponentLink4URL=https://datasheet.ciiva.com/6264/partnumbering-e-01-6264588.pdf?src-supplier=Digi-Key, ComponentLink5Description=https://datasheet.ciiva.com/11606/product-11606523.pdf?src-supplier=Avnet, ComponentLink5URL=https://datasheet.ciiva.com/11606/product-11606523.pdf?src-supplier=Avnet, ComponentLink6Description=https://datasheet.ciiva.com/16497/product-16497006.pdf?src-supplier=Future+Electronics, ComponentLink6URL=https://datasheet.ciiva.com/16497/product-16497006.pdf?src-supplier=Future+Electronics, Construction=Flat, Depth=2.5mm, Height=2.5mm, Lead Free="Lead Free", Length=3.2mm, Mount="Surface Mount", Packaging="Tape and Reel", Pricing 1="1=0.19500, 10=0.19500, 25=0.19500, 50=0.19500, 100=0.19500 (USD)", Radiation Hardening=No, Reach SVHC Compliant=Yes, RoHS=Yes, RoHS Compliant=Yes, Series=GRM, Stock 1=39686, Supplier 1=Newark, Termination=SMD/SMT, Thickness=0.106inch, Voltage Rating=10V, Voltage Rating (DC)=10V, Width=0.098inch
C22: library part "CAP CER 4.7uF 25V X5R 0805", "Cap Ceramic 4.7uF 25V X5R 10% SMD 0805 85C Embossed T/R", Case Code (Imperial)=0805, Case Code (Metric)=2012, Dielectric=X5R, Manufacturer=Samsung, Manufacturer Part Number=CL21A475KAQNNNE, Max Operating Temperature=85°C, Min Operating Temperature=-55°C, Package Quantity=1, Supplier Part Number 1=1276-1244-1-ND, Tolerance=10%, Voltage Rating=25V, Capacitance=4.7uF, Case/Package=0805, Category="Ceramic Capacitors", ComponentLink1Description=https://datasheet.ciiva.com/25798/cl21a475kaqnnne-25798882.pdf?src-supplier=Digi-Key, ComponentLink1URL=https://datasheet.ciiva.com/25798/cl21a475kaqnnne-25798882.pdf?src-supplier=Digi-Key, Construction=Flat, Depth=1.25mm, Height=1.25mm, Lead Free="Lead Free", Length=2mm, Mount="Surface Mount", Packaging="Tape and Reel", Pricing 1="1=0.11000, 10=0.08000, 50=0.04520, 100=0.03740, 500=0.02624, 1000=0.02172 (USD)", Radiation Hardening=No, RoHS=Yes, RoHS Compliant=Yes, Series=CL, Stock 1=3540, Supplier 1=Digi-Key, Thickness=0.055inch, Voltage Rating (DC)=25V, Width=0.049inch
FB1 FB2: library part "FB 68R 400mA 310mR 0402", "Ferrite Beads Multi-Layer 68Ohm 25% 100MHz 400mA 310mOhm DCR 0402 T/R", Case Code (Imperial)=0402, Case Code (Metric)=1005, DC Resistance (DCR)=310mR, Frequency=100MHz, Manufacturer="Taiyo Yuden", Manufacturer Part Number=BK1005LL680-T, Max Current Rating=400mA, Max Operating Temperature=125°C, Min Operating Temperature=-55°C, Package Quantity=1, Supplier Part Number 1=587-1860-1-ND, Tolerance=25%, Case/Package=0402, Category="Ferrite Beads and Chips", ComponentLink1Description=https://datasheet.ciiva.com/1013/bk1005ll680-t-ss-1013936.pdf?src-supplier=Digi-Key, ComponentLink1URL=https://datasheet.ciiva.com/1013/bk1005ll680-t-ss-1013936.pdf?src-supplier=Digi-Key, ComponentLink2Description=https://datasheet.ciiva.com/1013/mlci07-e-1013935.pdf?src-supplier=Digi-Key, ComponentLink2URL=https://datasheet.ciiva.com/1013/mlci07-e-1013935.pdf?src-supplier=Digi-Key, ComponentLink3Description=https://datasheet.ciiva.com/1013/mlci07-e-1013937.pdf?src-supplier=Digi-Key, ComponentLink3URL=https://datasheet.ciiva.com/1013/mlci07-e-1013937.pdf?src-supplier=Digi-Key, Core Material=Ferrite, Depth=0.55mm, Halogen Free="Halogen Free", Height=0.022inch, Impedance=68R, Lead Free="Lead Free", Length=0.039inch, Max DC Current=400mA, Mount="Surface Mount", Number of Lines=1, Number of Pins=2, Packaging="Tape and Reel", Pricing 1="1=0.10000, 10=0.04100, 25=0.03640, 50=0.03300, 100=0.02970, 250=0.02176, 500=0.01584, 1000=0.01551, 5000=0.01056 (USD)", REACH SVHC=Unknown, RoHS=Yes, Series=BK, Shielding=Unshielded, Stock 1=9707, Supplier 1=Digi-Key, Termination=SMD/SMT, Test Frequency=100MHz, Width=0.02inch
J1 J8: library part "CONN HDR 08 FEMALE RA 2 ROW", "Conn Socket Strip RCP 8 POS 2mm Solder RA SMD T/R", Current Rating=2A, Flammability Rating="UL94 V-0", Insulation Color=Black, Manufacturer=Harwin, Max Operating Temperature=105°C, Min Operating Temperature=-40°C, Supplier Part Number 1=45AJ6425, Category=Connectors, ComponentLink1Description=https://cdn.harwin.com/pdfs/M22-655R.pdf?src-supplier=Digi-Key, ComponentLink1URL=https://cdn.harwin.com/pdfs/M22-655R.pdf?src-supplier=Digi-Key, Connector Type=Receptacle,Forked, Contact Material=Bronze, Contact Plating=Gold, Contact Shape=Square, Fastening Type=Push,Pull, Insulation Material=Polymer, Manufacturer Part Number=M22-6550442R, Mount="Surface Mount", Number of Positions=8, Number of Rows=2, Packaging="Cut Tape", Pricing 1="1=1.17000, 100=0.91900, 250=0.84000, 500=0.76600, 1000=0.71200 (USD)", RoHS=Yes, RoHS Compliant=Yes, Stock 1=750, Supplier 1=Newark, Termination=Solder
J2 J7: library part "CONN HDR 08 MALE RA 2 ROW", "SMT Angled Pin Header WR-PHD, Pitch 2.54 mm, Dual Row, 8 pins", Color=Black, Current Rating=3A, Flammability Rating="UL94 V-0", Manufacturer="Wurth Electronics", Supplier Part Number 1=72Y1215, Voltage Rating=250V, Category=Connectors, ComponentLink1Description=http://www.farnell.com/cad/1889791.pdf?src-supplier=Element14, ComponentLink1URL=http://www.farnell.com/cad/1889791.pdf?src-supplier=Element14, ComponentLink2Description=https://katalog.we-online.de/em/datasheet/6101xx249121.pdf?src-supplier=Digi-Key, ComponentLink2URL=https://katalog.we-online.de/em/datasheet/6101xx249121.pdf?src-supplier=Digi-Key, ComponentLink3Description=https://www.distrelec.bizhttp://katalog.we-online.de/em/datasheet/6101xx249121.pdf?mime=application%2Fpdf&src-supplier=Distrelec, ComponentLink3URL=https://www.distrelec.bizhttp://katalog.we-online.de/em/datasheet/6101xx249121.pdf?mime=application%2Fpdf&src-supplier=Distrelec, Connector Type=Header, Contact Finish - Mating=GOLD, Contact Material="Copper Alloy", Contact Mating Length=0.236inch, Contact Plating=Gold, Contact Shape=Square, Contact Type="Male Pin", Fastening Type=Pull, Gender=Male, Insulation Color=Black, Insulation Material=Nylon, Manufacturer Part Number=610108249121, Mount="Surface Mount", Number of Contacts=8, Number of Pins=8, Number of Positions=8, Number of Rows=2, Packaging="Cut Tape", Pitch=0.1inch, Pricing 1="1=1.53000, 10=1.52000, 25=1.49000, 50=1.46000, 100=1.36000 (USD)", RoHS=Yes, RoHS Compliant=Yes, Row Spacing=0.1inch, Series=WR-PHD, Stock 1=350, Supplier 1=Newark, Termination=Solder
J3 J5: library part "CON SMA PIN SMD BRD EDGE HJ-SMA362"
J4 J6: library part "CON SMA BORE SMD BRD EDGE HJ-SMA023"
L1: library part "IND HF 390nH 50mA 8R 0402", "Inductor High Frequency Chip Unshielded Multi-Layer 390nH 5% 50MHz 6Q-Factor Ceramic 50mA 8Ohm DCR 0402 T/R", Case Code (Imperial)=0402, Case Code (Metric)=1005, Current Rating=50mA, DC Resistance (DCR)=8R, Manufacturer=TDK, Manufacturer Part Number=MLG1005SR39JT000, Max Operating Temperature=125°C, Min Operating Temperature=-55°C, Package Quantity=10000, Self Resonant Frequency=300MHz, Supplier Part Number 1=69AH1243, Test Frequency=50MHz, Tolerance=5%, Case/Package=0402, Category="Fixed Inductors", ComponentLink1Description=https://datasheet.ciiva.com/29690/inductor-commercial-high-frequency-mlg-en-29690424.pdf?src-supplier=Digi-Key, ComponentLink1URL=https://datasheet.ciiva.com/29690/inductor-commercial-high-frequency-mlg-en-29690424.pdf?src-supplier=Digi-Key, ComponentLink2Description=https://datasheet.ciiva.com/29690/inductor-commercial-high-frequency-mlg-en-29690423.pdf?src-supplier=Digi-Key, ComponentLink2URL=https://datasheet.ciiva.com/29690/inductor-commercial-high-frequency-mlg-en-29690423.pdf?src-supplier=Digi-Key, ComponentLink3Description=https://datasheet.ciiva.com/29690/inductor-commercial-high-frequency-mlg-en-29690425.pdf?src-supplier=Digi-Key, ComponentLink3URL=https://datasheet.ciiva.com/29690/inductor-commercial-high-frequency-mlg-en-29690425.pdf?src-supplier=Digi-Key, Core Material=Non-Magnetic, Height - Seated (Max)=0.022inch, Inductance=390nH, Length=0.039inch, Mount="Surface Mount", Packaging="Tape and Reel", Pricing 1="1=0.13000, 10=0.08700, 25=0.08200, 50=0.07600, 100=0.07100 (USD)", RoHS=Yes, RoHS Compliant=Yes, Shielding=Unshielded, Stock 1=9470, Supplier 1=Newark, Width=0.02inch
L2: library part "IND 10uH 1.2A 180mR 4040 NRS4018T100MDGJ", "Inductor Power Shielded Wirewound 10uH 20% 100KHz Ferrite 1.2A 0.18Ohm DCR 1515 T/R", Case/Package=4018, Current Rating=1.2A, DC Resistance (DCR)=180mR, Inductance Tolerance=20%, Manufacturer="Taiyo Yuden", Manufacturer Part Number=NRS4018T100MDGJ, Max Operating Temperature=125°C, Min Operating Temperature=-25°C, Package Quantity=3500, Resistor Type=Wirewound, Saturation Current=1.3A, Self Resonant Frequency=25MHz, Supplier Part Number 1=26AC2706, Test Frequency=100kHz, Category="Fixed Inductors", ComponentLink1Description=https://datasheet.ciiva.com/7197/nrs4018t100mdgj-ss-7197570.pdf?src-supplier=Newark, ComponentLink1URL=https://datasheet.ciiva.com/7197/nrs4018t100mdgj-ss-7197570.pdf?src-supplier=Newark, ComponentLink2Description=https://datasheet.ciiva.com/25607/0900766b810b3cd2-25607943.pdf?src-supplier=RSComponents, ComponentLink2URL=https://datasheet.ciiva.com/25607/0900766b810b3cd2-25607943.pdf?src-supplier=RSComponents, ComponentLink3Description=https://datasheet.ciiva.com/8504/nrs4018t100mdgj-ss-8504500.pdf?src-supplier=Avnet, ComponentLink3URL=https://datasheet.ciiva.com/8504/nrs4018t100mdgj-ss-8504500.pdf?src-supplier=Avnet, Core Material=Ferrite, Depth=4.2mm, Halogen Free="Halogen Free", Height=1.8mm, Height - Seated (Max)=0.071inch, Inductance=10uH, Lead Free="Lead Free", Lead Pitch=2.8mm, Length=4mm, Max DC Current=1.2A, Mount="Surface Mount", Number of Pins=2, Packaging="Tape and Reel", Pricing 1="3500=0.14600, 7000=0.14500 (CAD)", Radiation Hardening=No, Reach SVHC Compliant=Yes, RMS Current (Irms)=1.2A, RoHS=Yes, RoHS Compliant=Yes, Series=NRS, Shielding=Shielded, Stock 1=105000, Supplier 1=Newark, Termination=SMD/SMT, Tolerance=20%, Width=0.157inch
LD1: library part "LD TYPE A GREEN 30mW GH05230H2K", Manufacturer=Sharp, Manufacturer Part Number=GH05230H2K, Supplier Part Number 1=852-GH05230H2K, Pricing 1="1=6.31000, 10=4.45000, 50=4.45000, 100=3.64000, 1000=2.99000, 10000=2.89000 (USD)", Stock 1=1976, Supplier 1=Mouser
M1 M2 M3 M4: library part "MECH M2.0 UNPLATED"
Q1: library part "TRANS NMOS 60V SOT-23-3 2N7002K-T1-E3", "Trans MOSFET N-CH 60V 0.3A 3-Pin SOT-23 T/R - Tape and Reel (Alt: 2N7002K-T1-E3)", Case/Package=SOT-23-3, Continuous Drain Current (ID)=300mA, Drain to Source Breakdown Voltage=70V, Drain to Source Resistance=7.5R, Drain to Source Voltage (Vdss)=60V, Drain-source On Resistance-Max=2R, Gate to Source Voltage (Vgs)=20V, Input Capacitance=30pF, Manufacturer="Vishay Siliconix", Max Operating Temperature=150°C, Max Power Dissipation=200mW, Min Operating Temperature=-55°C, Package Quantity=1, Power Dissipation=350mW, Supplier Part Number 1=06J8894, Threshold Voltage=2V, Category=MOSFETs, ComponentLink1Description=https://datasheet.ciiva.com/15137/getdatasheetpartid-75158-15137377.pdf?src-supplier=Verical, ComponentLink1URL=https://datasheet.ciiva.com/15137/getdatasheetpartid-75158-15137377.pdf?src-supplier=Verical, ComponentLink2Description=https://datasheet.ciiva.com/1254/70226-1254497.pdf?src-supplier=Newark, ComponentLink2URL=https://datasheet.ciiva.com/1254/70226-1254497.pdf?src-supplier=Newark, ComponentLink3Description=https://datasheet.ciiva.com/4440/70226-240087-4440695.pdf?src-supplier=Mouser, ComponentLink3URL=https://datasheet.ciiva.com/4440/70226-240087-4440695.pdf?src-supplier=Mouser, ComponentLink4Description=https://datasheet.ciiva.com/8084/2n7002k-8084215.pdf?src-supplier=Avnet, ComponentLink4URL=https://datasheet.ciiva.com/8084/2n7002k-8084215.pdf?src-supplier=Avnet, ComponentLink5Description=https://datasheet.ciiva.com/6367/2n7002k-6367013.pdf?src-supplier=Digi-Key, ComponentLink5URL=https://datasheet.ciiva.com/6367/2n7002k-6367013.pdf?src-supplier=Digi-Key, ComponentLink6Description=https://datasheet.ciiva.com/6367/2n7002k-6367016.pdf?src-supplier=Digi-Key, ComponentLink6URL=https://datasheet.ciiva.com/6367/2n7002k-6367016.pdf?src-supplier=Digi-Key, ComponentLink7Description=https://datasheet.ciiva.com/16376/2n7002k-16376713.pdf?src-supplier=Future+Electronics, ComponentLink7URL=https://datasheet.ciiva.com/16376/2n7002k-16376713.pdf?src-supplier=Future+Electronics, ComponentLink8Description=https://datasheet.ciiva.com/7788/2n7002k-7788909.pdf?src-supplier=Element14, ComponentLink8URL=https://datasheet.ciiva.com/7788/2n7002k-7788909.pdf?src-supplier=Element14, ComponentLink9Description=https://datasheet.ciiva.com/22749/1911668-22749621.pdf?src-supplier=Element14, ComponentLink9URL=https://datasheet.ciiva.com/22749/1911668-22749621.pdf?src-supplier=Element14, Element Configuration=Single, Height=1.02mm, Lead Free="Lead Free", Length=3.04mm, Manufacturer Part Number=2N7002K-T1-E3, Mount="Surface Mount", Nominal Vgs=2V, Number of Channels=1, Number of Elements=1, Number of Pins=3, On-State Resistance=2R, Packaging="Tape and Reel", Polarity=N-CHANNEL, Polarization=N, Pricing 1="1=0.38000, 25=0.31000, 50=0.26100, 100=0.21200, 250=0.18600, 500=0.15900 (USD)", Radiation Hardening=No, Rds On Max=2R, RoHS=Yes, RoHS Compliant=Yes, Series=TrenchFET®, Stock 1=29333, Supplier 1=Newark, Turn-Off Delay Time=35ns, Turn-On Delay Time=25ns, Weight=0.050717oz, Width=1.4mm
R1 R2: library part "RES GENERIC 0603"
R3: library part "RES 33k0 1% 63mW 0402", "Res Thick Film 0402 33K Ohm 1% 0.063W(1/16W) ±100ppm/C Pad SMD T/R", Case Code (Imperial)=0402, Case Code (Metric)=1005, Manufacturer=Samsung, Manufacturer Part Number=RC1005F333CS, Max Operating Temperature=155°C, Max Power Dissipation=63mW, Min Operating Temperature=-55°C, Package Quantity=1, Resistance=33kR, Resistor Type="Thick Film", Supplier Part Number 1=1276-3461-2-ND, Temperature Coefficient=100ppm/°C, Tolerance=1%, Voltage Rating (DC)=50V, Case/Package=0402, Category="Chip SMD Resistors", ComponentLink1Description=http://components.arrow.com/part/dataview/51978774S9968740N4139?src-supplier=Arrow+Electronics, ComponentLink1URL=http://components.arrow.com/part/dataview/51978774S9968740N4139?src-supplier=Arrow+Electronics, ComponentLink2Description=http://components.arrow.com/part/dataview/0323_06900084?src-supplier=Arrow+Europe, ComponentLink2URL=http://components.arrow.com/part/dataview/0323_06900084?src-supplier=Arrow+Europe, ComponentLink3Description=http://www.samsungsem.com/servlet/FileDownload?type=spec&file=RC1005F9090CS.pdf&src-supplier=Avnet, ComponentLink3URL=http://www.samsungsem.com/servlet/FileDownload?type=spec&file=RC1005F9090CS.pdf&src-supplier=Avnet, ComponentLink4Description=http://www.samsungsem.com/kr/support/product-search/chip-resistor/RC1005F333CS.jsp?src-supplier=Digi-Key, ComponentLink4URL=http://www.samsungsem.com/kr/support/product-search/chip-resistor/RC1005F333CS.jsp?src-supplier=Digi-Key, Construction=Rectangular, Contact Plating=Tin, Depth=0.5mm, Features="Moisture Resistant", Height=0.016inch, Lead Free="Lead Free", Length=0.039inch, Military Standard=Not, Number of Terminations=2, Packaging="Tape and Reel", Pricing 1="10000=0.00695 (USD)", Radiation Hardening=No, RoHS=Yes, RoHS Compliant=Yes, Series=RC, Stock 1=330000, Supplier 1=Digi-Key, Width=0.02inch
R4: library part "RES 120R 1% 1W 2512", "RES SMD 120 OHM 1% 1W 2512", Case Code (Imperial)=2512, Case Code (Metric)=6432, Manufacturer=Yageo, Manufacturer Part Number=RC2512FK-07120RL, Max Operating Temperature=155°C, Max Power Dissipation=1W, Min Operating Temperature=-55°C, Resistor Type="Thick Film", Supplier Part Number 1=82AH8664, Temperature Coefficient=100ppm/°C, Tolerance=1%, Voltage Rating=200V, Case/Package=2512, Category="Chip SMD Resistors", ComponentLink1Description=https://datasheet.ciiva.com/12575/pyu-rc2512-51-rohs-l-4-12575294.pdf?src-supplier=Mouser, ComponentLink1URL=https://datasheet.ciiva.com/12575/pyu-rc2512-51-rohs-l-4-12575294.pdf?src-supplier=Mouser, Construction=Rectangular, Contact Plating=Tin,Matte,Lead, Depth=3.1mm, Features="Moisture Resistant", Height=0.026inch, Length=6.35mm, Military Standard=Not, Number of Terminations=2, Packaging="Tape and Reel", Power Rating=1W, Pricing 1="1=0.37700, 10=0.20200, 25=0.16100, 50=0.12000, 100=0.07900 (USD)", Radiation Hardening=No, Resistance=120R, RoHS=Yes, RoHS Compliant=Yes, Series=RC, Stock 1=1840, Supplier 1=Newark, Termination=SMD/SMT, Width=0.122inch
R5 R6 R12 R17 R21 R22 R25: library part "RES 0R 63mW 0402", "GLOVE, POLYAMIDE, L/FREE, PU, SIZE 6 - More Details", Case Code (Imperial)=0402, Case Code (Metric)=1005, Current Rating=1A, Manufacturer="Stackpole Electronics", Manufacturer Part Number=RMCF0402ZT0R00, Max Operating Temperature=155°C, Max Power Dissipation=63mW, Min Operating Temperature=-55°C, Resistor Type="Thick Film", Supplier Part Number 1=RMCF0402ZT0R00CT-ND, Working Voltage=50V, Case/Package=0402, Category="Chip SMD Resistors", ComponentLink1Description=https://datasheet.ciiva.com/26835/getdatasheetpartid-409751-26835612.pdf?src-supplier=Verical, ComponentLink1URL=https://datasheet.ciiva.com/26835/getdatasheetpartid-409751-26835612.pdf?src-supplier=Verical, Construction=Rectangular, Contact Plating=Tin,Matte, Depth=0.5mm, Features="Automotive AEC-Q200", Height=0.016inch, Lead Free="Lead Free", Length=0.039inch, Military Standard=Not, Mount="Surface Mount", Number of Terminations=2, Packaging="Tape and Reel", Power Rating=63mW, Pricing 1="1=0.10000, 10=0.01000, 25=0.00720, 50=0.00560, 100=0.00410, 250=0.00316, 500=0.00252, 1000=0.00186, 5000=0.00133 (USD)", Radiation Hardening=No, Resistance=0R, RoHS=Yes, RoHS Compliant=Yes, Series=RMCF, Stock 1=5203223, Supplier 1=Digi-Key, Technology="THICK FILM", Width=0.02inch
R7 R8: library part "RES 22.1k 1% 63mW 0402", "Res Thick Film 0402 22.1K Ohm 1% 0.063W(1/16W) ±100ppm/°C Pad SMD T/R", Case Code (Imperial)=0402, Case Code (Metric)=1005, Manufacturer=Yageo, Manufacturer Part Number=RC0402FR-0722K1L, Max Operating Temperature=155°C, Max Power Dissipation=63mW, Min Operating Temperature=-55°C, Package Quantity=1, Power Rating=62.5mW, Resistance=22.1kR, Resistance Tolerance=1%, Resistor Type="Thick Film", Supplier Part Number 1=82AH7906, Temperature Coefficient=100ppm/°C, Voltage Rating=50V, Case/Package=0402, Category="Chip SMD Resistors", ComponentLink1Description=https://datasheet.ciiva.com/7983/1018594-7983501.pdf?src-supplier=Element14, ComponentLink1URL=https://datasheet.ciiva.com/7983/1018594-7983501.pdf?src-supplier=Element14, ComponentLink2Description=https://datasheet.ciiva.com/2553/pyu-r-int-thick-7-2553201.pdf?src-supplier=Digi-Key, ComponentLink2URL=https://datasheet.ciiva.com/2553/pyu-r-int-thick-7-2553201.pdf?src-supplier=Digi-Key, ComponentLink3Description=https://datasheet.ciiva.com/2553/pyu-r-int-thick-7-2553202.pdf?src-supplier=Digi-Key, ComponentLink3URL=https://datasheet.ciiva.com/2553/pyu-r-int-thick-7-2553202.pdf?src-supplier=Digi-Key, ComponentLink4Description=https://datasheet.ciiva.com/2553/pyu-r-int-thick-7-2553200.pdf?src-supplier=Digi-Key, ComponentLink4URL=https://datasheet.ciiva.com/2553/pyu-r-int-thick-7-2553200.pdf?src-supplier=Digi-Key, ComponentLink5Description=https://datasheet.ciiva.com/15189/getdatasheetpartid-251817-15189388.pdf?src-supplier=Verical, ComponentLink5URL=https://datasheet.ciiva.com/15189/getdatasheetpartid-251817-15189388.pdf?src-supplier=Verical, Construction=Rectangular, Depth=0.5mm, Features="Moisture Resistant", Height=0.016inch, Lead Free="Lead Free", Length=0.039inch, Military Standard=Not, Number of Terminations=2, Packaging="Tape and Reel", Pricing 1="1=0.06100, 10=0.00800, 25=0.00600, 50=0.00500, 100=0.00300 (USD)", Reach SVHC Compliant=Yes, RoHS=Yes, RoHS Compliant=Yes, Series=RC, Stock 1=107993, Supplier 1=Newark, Technology="THICK FILM", Termination=SMD/SMT, Tolerance=1%, Voltage Rating (DC)=50V, Width=0.02inch, Working Voltage=50V
R9 R18 R19: library part "RES 10k0 1% 63mW 0402", "Res General Purpose Thick Film 0402 10K Ohm 1% 1/16W ±100ppm/°C Molded SMD Paper T/R", Case Code (Imperial)=0402, Case Code (Metric)=1005, Manufacturer=Yageo, Manufacturer Part Number=RC0402FR-0710KL, Max Operating Temperature=155°C, Max Power Dissipation=63mW, Min Operating Temperature=-55°C, Power Rating=62.5mW, Resistance=10kR, Resistance Tolerance=1%, Resistor Type="Thick Film", Supplier Part Number 1=1987643, Temperature Coefficient=100ppm/°C, Voltage Rating=50V, Case/Package=0402, Category="Chip SMD Resistors", ComponentLink1Description=https://datasheet.ciiva.com/7660/38568-7660787.pdf?src-supplier=Element14, ComponentLink1URL=https://datasheet.ciiva.com/7660/38568-7660787.pdf?src-supplier=Element14, ComponentLink2Description=https://datasheet.ciiva.com/12667/pyu-rc0402-51-rohs-l-6-r-12667067.pdf?src-supplier=Mouser, ComponentLink2URL=https://datasheet.ciiva.com/12667/pyu-rc0402-51-rohs-l-6-r-12667067.pdf?src-supplier=Mouser, ComponentLink3Description=https://datasheet.ciiva.com/7849/1784430-7849813.pdf?src-supplier=Element14, ComponentLink3URL=https://datasheet.ciiva.com/7849/1784430-7849813.pdf?src-supplier=Element14, ComponentLink4Description=https://datasheet.ciiva.com/7849/1686128-7849814.pdf?src-supplier=Element14, ComponentLink4URL=https://datasheet.ciiva.com/7849/1686128-7849814.pdf?src-supplier=Element14, ComponentLink5Description=https://datasheet.ciiva.com/7849/1784430-7849815.pdf?src-supplier=Element14, ComponentLink5URL=https://datasheet.ciiva.com/7849/1784430-7849815.pdf?src-supplier=Element14, ComponentLink6Description=https://datasheet.ciiva.com/7983/1018594-7983486.pdf?src-supplier=Element14, ComponentLink6URL=https://datasheet.ciiva.com/7983/1018594-7983486.pdf?src-supplier=Element14, ComponentLink7Description=https://datasheet.ciiva.com/22747/1018594-22747512.pdf?src-supplier=Element14, ComponentLink7URL=https://datasheet.ciiva.com/22747/1018594-22747512.pdf?src-supplier=Element14, Construction=Rectangular, Depth=0.5mm, Features="Moisture Resistant", Height=0.32mm, Lead Free="Lead Free", Lead Pitch=0.2mm, Length=1mm, Military Standard=Not, Number of Pins=2, Number of Terminations=2, Packaging="Tape and Reel", Pricing 1="10000=0.00300 (GBP)", REACH SVHC="No SVHC", RoHS=Yes, RoHS Compliant=Yes, Series=RC, Stock 1=29900, Supplier 1=RSComponents, Termination=SMD/SMT, Tolerance=1%, Voltage Rating (DC)=50V, Width=0.5mm, Working Voltage=50V